# Altium PCB ArtFire.PcbDoc (part 1 of 2)
Units mil, origin at the board's own origin, x right, y up, seen from the top; angles counter-clockwise.
Board outline 4250 x 3350 mil, 2 copper layers (Top Layer, Bottom Layer); 232 components, 155 nets, 793 pads, 301 vias.
Unrouted connection lines stored in the file: 12.
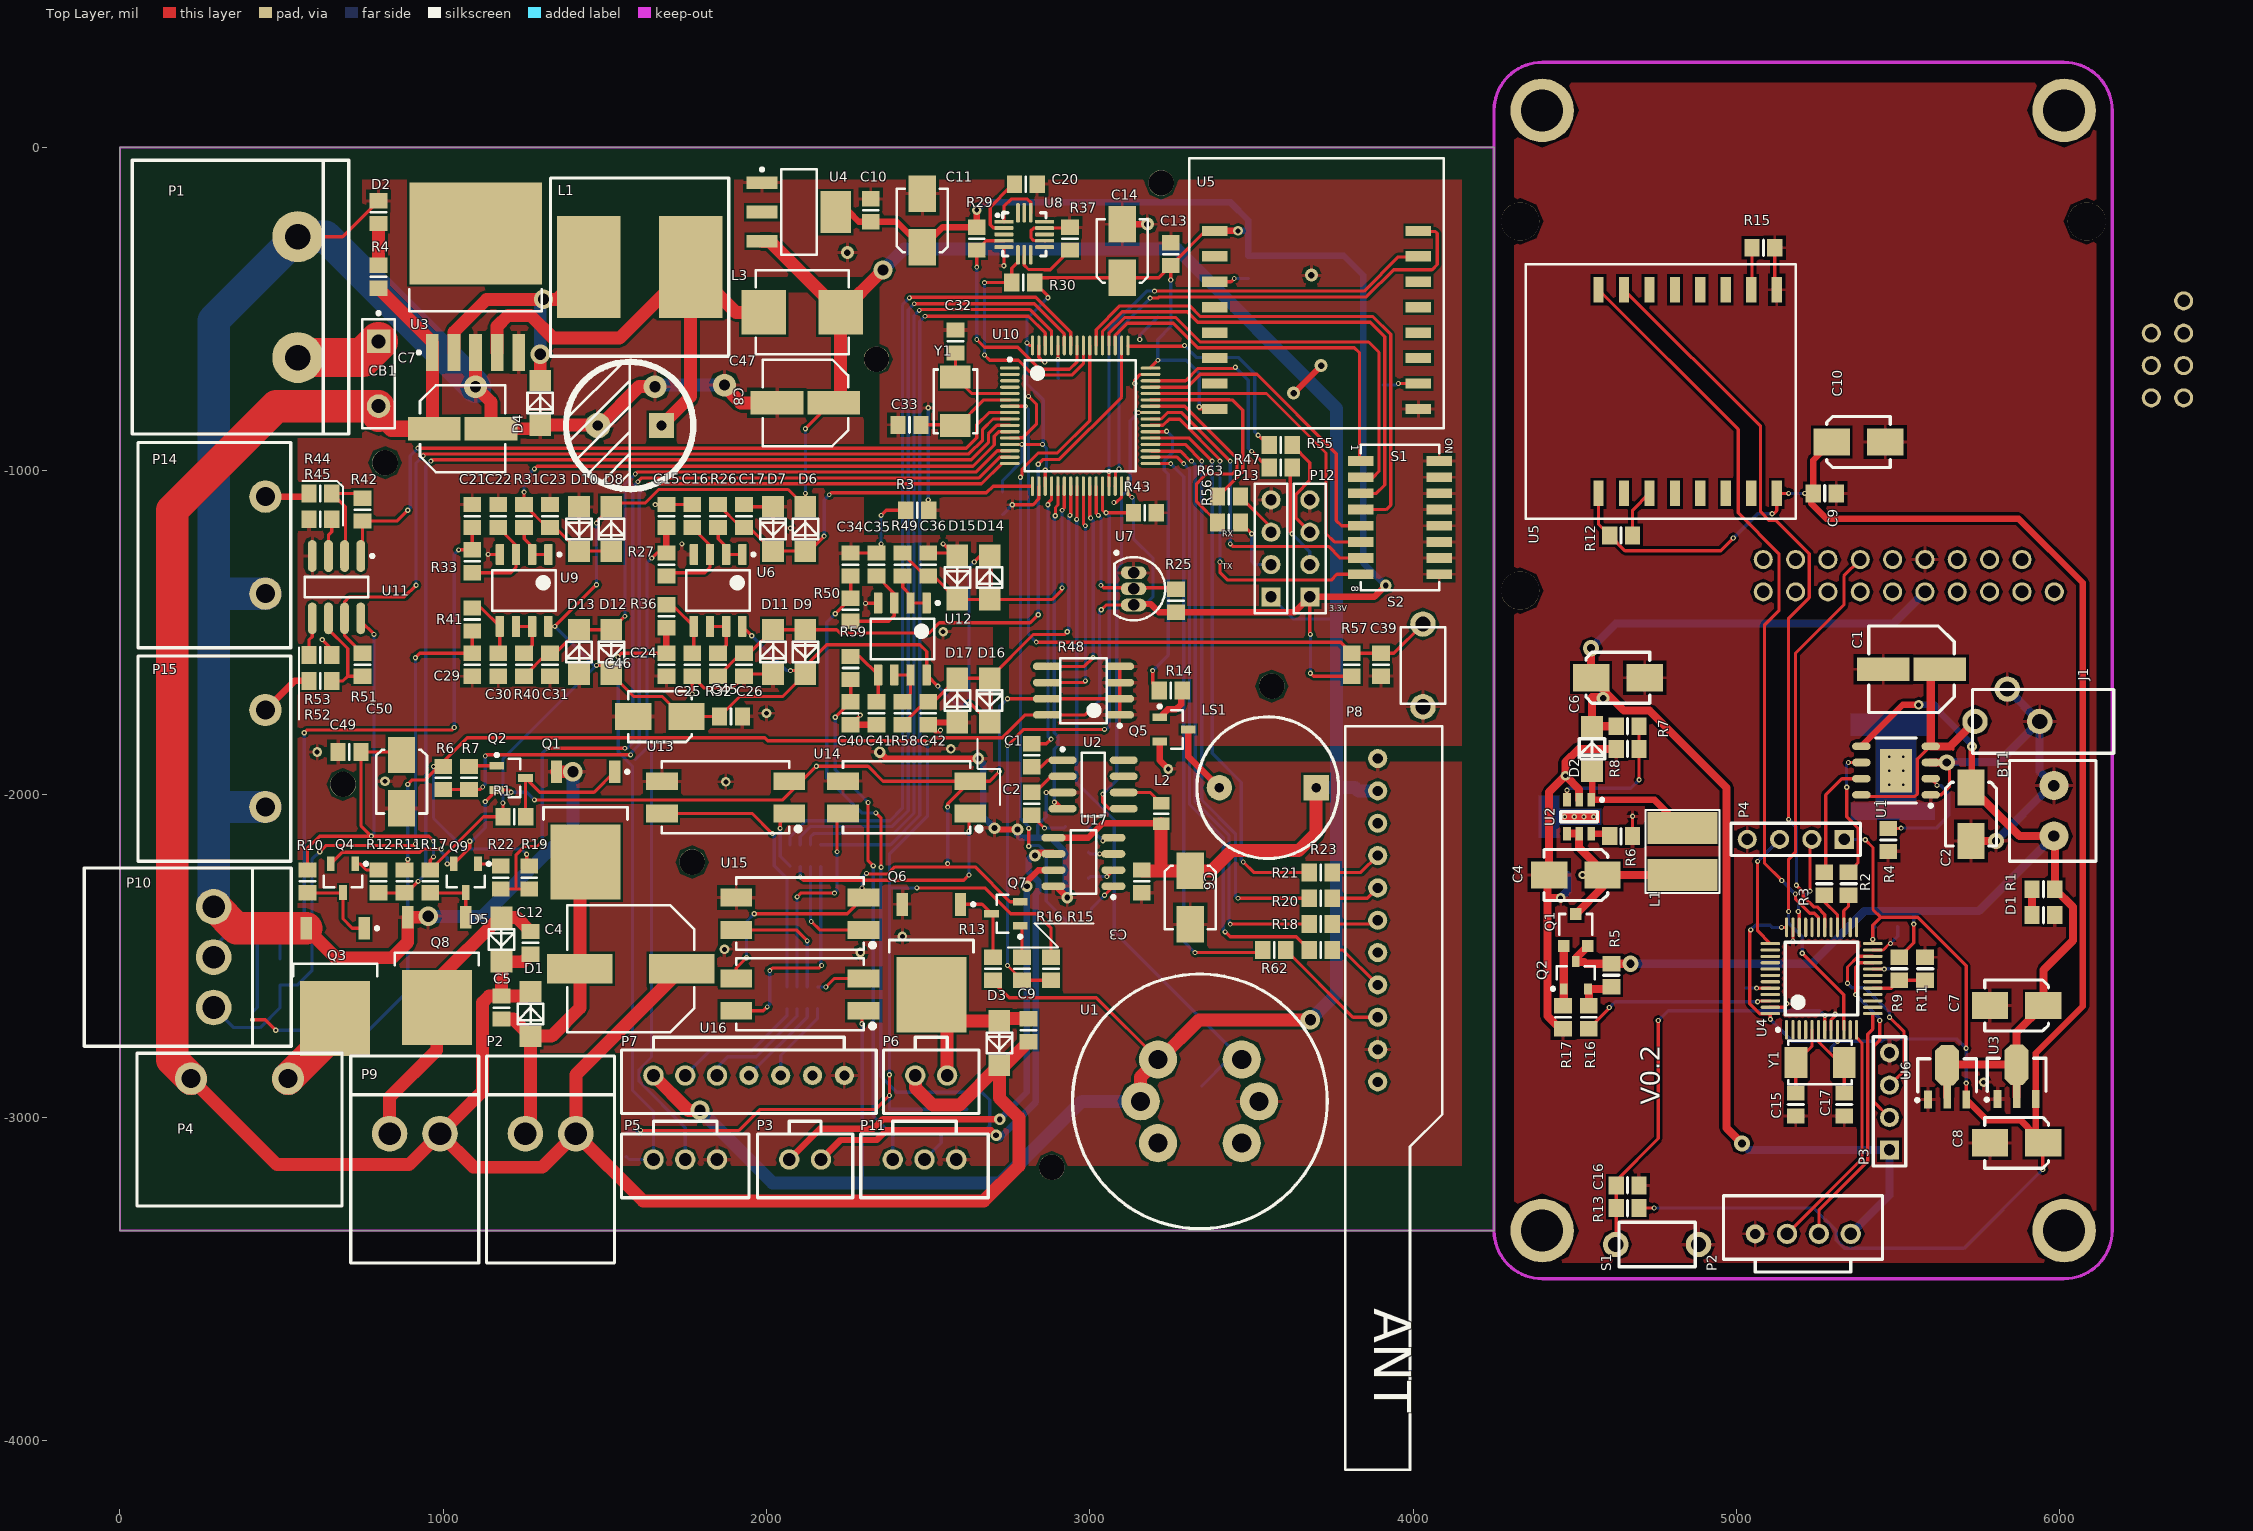
[diagram p0: Top Layer view]
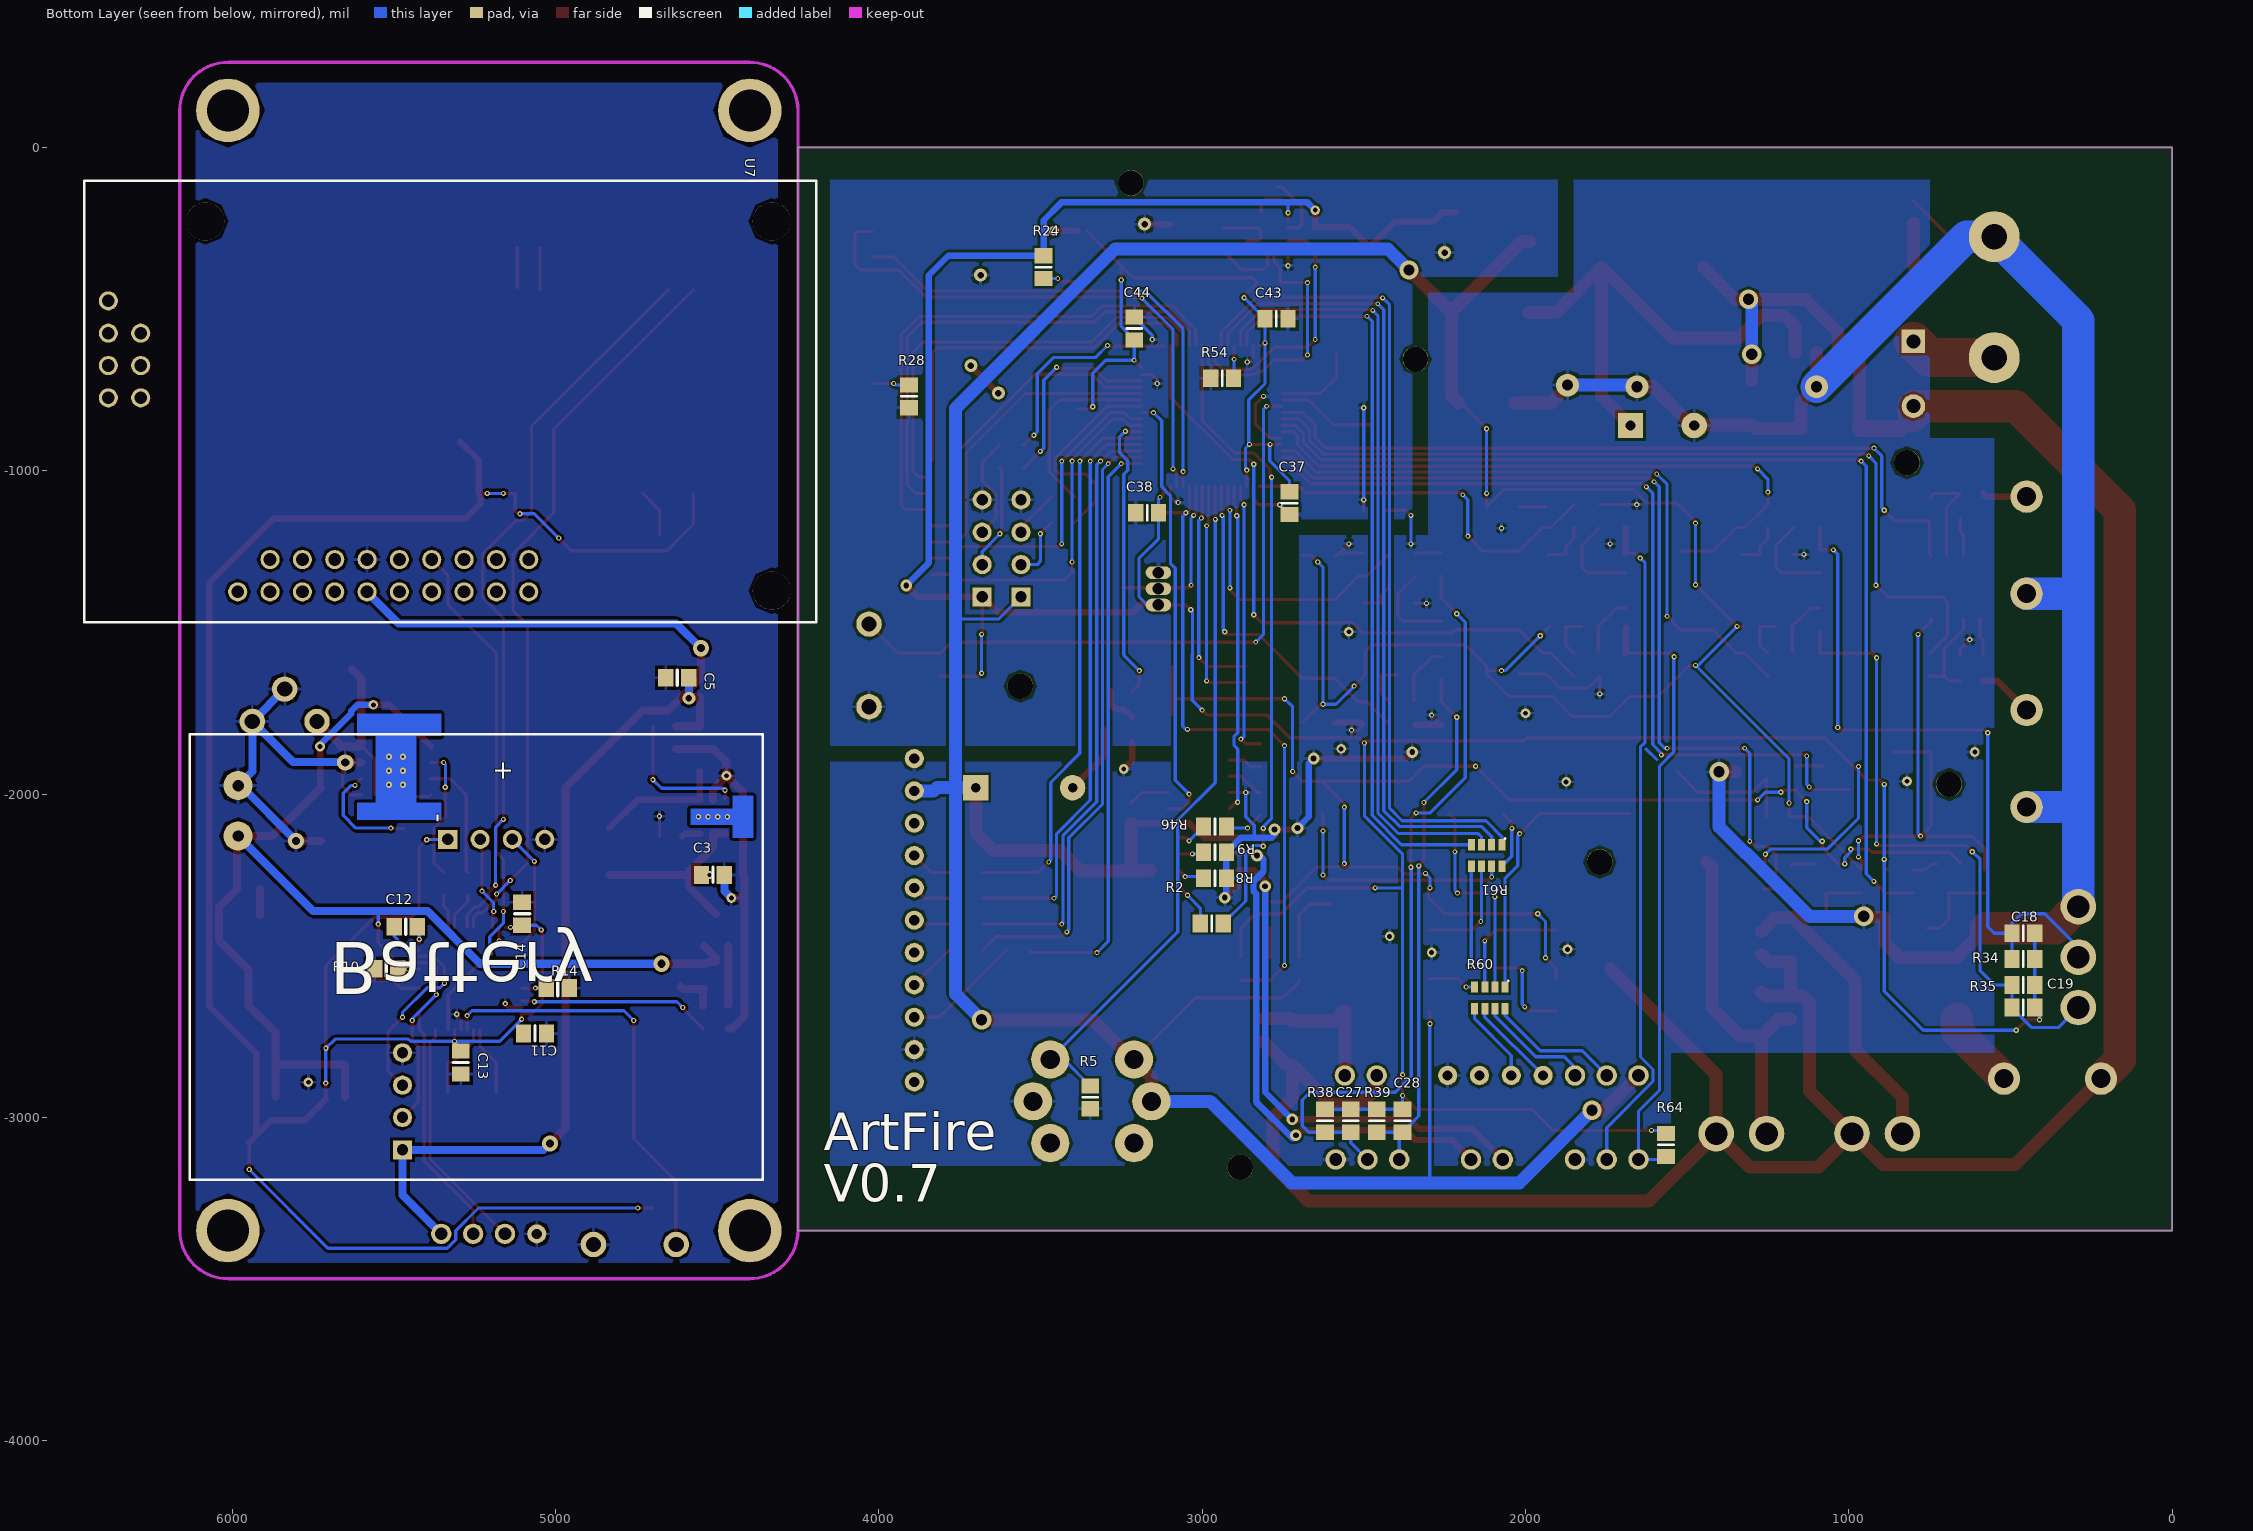
[diagram p1: Bottom Layer view, seen from below]

## Layer stack, top to bottom
Top Solder: solder mask 0.4, Solder Resist, Dk 3.5
Top Layer: signal copper 1.4
Dielectric 1: dielectric 12.6, FR-4, Dk 4.8
Bottom Layer: signal copper 1.4
Bottom Solder: solder mask 0.4, Solder Resist, Dk 3.5

## Board outline
0,-3350 0,0 4250,0 4250,-3350

## Design rules (kind name [scope] priority, off if disabled: settings)
Clearance [All] p1: gap=8
MinimumSolderMaskSliver [All] p1: minsoldermaskwidth=0
PolygonConnect [All] p1: connectstyle=Relief reliefconductorwidth=10 reliefentries=4 polygonreliefangle="90 Angle" airgapwidth=10
RoutingVias [All] p1: holewidth=8 width=8 viastyle="Through Hole" minholewidth=8 minwidth=15 maxholewidth=100 maxwidth=1000
SilkToSilkClearance [All] p1: silktosilkclearance=0
SilkToSolderMaskClearance [IsPad] p1: minsilkscreentomaskgap=0 clearancetoexposedcopper=TRUE
SolderMaskExpansion [All] p1: expansion=4
Width [All] p1: maxlimit=1000 minlimit=8 preferedwidth=8
27 further rules are at their usual default settings.

## Classes and differential pairs
component class ArtFire: C18 C19 C20 C21 C22 C23 C24 C25 C26 C27 C28 C29 C30 C31 C32 C33 C34 C35 C36 C37 C38 C39 C40 C41 C42 C43 C44 C45 C46 C47 C49 C50 CB1 D3 D4 D5 D6 D7 D8 D9 D10 D11 D12 D13 D14 D15 D16 D17 L2 L3 LS1 P1 P5 P6 P7 P8 P9 P10 P11 P12 P13 P14 P15 Q3 Q4 Q5 Q6 Q7 Q8 Q9 R18 R19 R20 R21 R22 R23 R24 R25 R26 R27 R28 R29 R30 R31 R32 R33 R34 R35 R36 R37 R38 R39 R40 R41 R42 R43 R44 R45 R46 R47 R48 R49 R50 R51 R52 R53 R54 R55 R56 R57 R58 R59 R60 R61 R62 R63 R64 S2 U8 U9 U10 U11 U12 U13 U14 U15 U16 U17

## Components (designator, comment, footprint, x,y, rotation, side; value= is the part's Value field where it differs from the comment)
BT1 "Battery" KF3.96_2P 5981.46,-2129.53 r180 top
C1 "Cap Semi" 6-0805_N 2820,-1880 r270 top
C1 "Cap Pol1" CAP_6.3*5.4MM 5540.83,-1614 r180 top
C2 "Cap Semi" 6-0805_N 2820,-2030 r90 top
C2 "Cap Pol1" Cap_5*4mm 5724.83,-2062 r270 top
C3 "Cap Semi" 6-0805_N 3160,-2270 r90 top
C3 "Cap Semi" 6-0805_N 4512.83,-2250 r180 bottom
C4 "Cap Pol1" CAP_10*10MM 1580,-2540 r180 top
C4 "Cap Pol1" Cap_5*4mm 4502.83,-2250 r180 top
C5 "Cap Semi" 6-0805_N 1180,-2660 r270 top
C5 "Cap Semi" 6-0805_N 4622.83,-1640 r0 bottom
C6 "Cap Pol1" Cap_5*4mm 3310,-2320 r270 top
C6 "Cap Pol1" Cap_5*4mm 4632.83,-1640 r0 top
C7 "Cap Pol1" CAP_6.3*5.4MM 1060,-870 r0 top
C7 "Cap Pol1" Cap_5*4mm 5866.02,-2653.62 r180 top
C8 "Cap Pol1" CAP10_17 1675,-860 r180 top
C8 "Cap Pol1" Cap_5*4mm 5866.02,-3078.62 r180 top
C9 "Cap Semi" 6-0805_N 2810,-2730 r90 top
C9 "Cap Semi" 6-0805_N 5272.83,-1070 r0 top
C10 "Cap Semi" 6-0805_N 2322,-194 r90 top
C10 "Cap Pol1" Cap_5*4mm 5376.83,-911 r0 top
C11 "Cap Pol1" Cap_5*4mm 2482,-226 r90 top
C11 "Cap Semi" 6-0805_N 5062.83,-2740 r180 bottom
C12 "Cap Semi" 6-0805_N 1270,-2460 r90 top
C12 "Cap Semi" 6-0805_N 5462.83,-2410 r0 bottom
C13 "Cap Semi" 6-0805_N 3250,-330 r90 top
C13 "Cap Semi" 6-0805_N 5292.83,-2830 r270 bottom
C14 "Cap Pol1" Cap_5*4mm 3100,-320 r90 top
C14 "Cap Semi" 6-0805_N 5102.83,-2370 r90 bottom
C15 "Cap Semi" 6-0805_N 1690,-1140 r270 top
C15 "Cap Semi" 6-0805_N 5182.83,-2960 r270 top
C16 "Cap Semi" 6-0805_N 1770,-1140 r270 top
C16 "Cap Semi" 6-0805_N 4662.83,-3210 r180 top
C17 "Cap Semi" 6-0805_N 1930,-1140 r270 top
C17 "Cap Semi" 6-0805_N 5332.83,-2960 r270 top
C18 "Cap Semi" 6-0805_N 460,-2430 r180 bottom
C19 "Cap Semi" 6-0805_N 460,-2660 r180 bottom
C20 "Cap Semi" 6-0805_N 2802,-114 r180 top
C21 "Cap Semi" 6-0805_N 1090,-1140 r270 top
C22 "Cap Semi" 6-0805_N 1170,-1140 r270 top
C23 "Cap Semi" 6-0805_N 1330,-1140 r270 top
C24 "Cap Semi" 6-0805_N 1690,-1600 r90 top
C25 "Cap Semi" 6-0805_N 1770,-1600 r90 top
C26 "Cap Semi" 6-0805_N 1930,-1600 r90 top
C27 "Cap Semi" 6-0805_N 2540,-3010 r90 bottom
C28 "Cap Semi" 6-0805_N 2380,-3010 r90 bottom
C29 "Cap Semi" 6-0805_N 1090,-1600 r90 top
C30 "Cap Semi" 6-0805_N 1170,-1600 r90 top
C31 "Cap Semi" 6-0805_N 1330,-1600 r90 top
C32 "Cap Semi" 6-0805_N 2584,-600 r90 top
C33 "Cap Semi" 6-0805_N 2442,-858 r180 top
C34 "Cap Semi" 6-0805_N 2260,-1290 r270 top
C35 "Cap Semi" 6-0805_N 2340,-1290 r270 top
C36 "Cap Semi" 6-0805_N 2500,-1290 r270 top
C37 "Cap Semi" 6-0805_N 2730,-1100 r270 bottom
C38 "Cap Semi" 6-0805_N 3170,-1130 r0 bottom
C39 "Cap Semi" 6-0805_N 3900,-1600 r90 top
C40 "Cap Semi" 6-0805_N 2260,-1750 r90 top
C41 "Cap Semi" 6-0805_N 2340,-1750 r90 top
C42 "Cap Semi" 6-0805_N 2500,-1750 r90 top
C43 "Cap Semi" 6-0805_N 2770,-530 r180 bottom
C44 "Cap Semi" 6-0805_N 3210,-560 r90 bottom
C45 "Cap Semi" 6-0805_N 1890,-1760 r0 top
C46 "Cap Pol1" Cap_5*4mm 1670,-1760 r180 top
C47 "Cap Pol1" CAP_6.3*5.4MM 2120,-790 r180 top
C49 "Cap Semi" 6-0805_N 710,-1870 r180 top
C50 "Cap Pol1" Cap_5*4mm 871.02,-1961.43 r270 top
CB1 "RF16700" SPST-2 800,-700 r270 top
D1 "Diode US1M" US1M 1270,-2680 r90 top
D1 "PWR" 6-0805_N 5948.83,-2374 r0 top
D2 "PWR" 6-0805_N 800,-200 r90 top
D2 "Diode US1M" US1M 4552.83,-1860 r90 top
D3 "Diode US1M" US1M 2720,-2770 r270 top
D4 "1N5822" US1M 1300,-790 r90 top
D5 "Diode US1M" US1M 1180,-2450 r270 top
D6 "Diode US1M" US1M 2120,-1180 r90 top
D7 "Diode US1M" US1M 2020,-1180 r270 top
D8 "Diode US1M" US1M 1520,-1180 r90 top
D9 "Diode US1M" US1M 2120,-1560 r270 top
D10 "Diode US1M" US1M 1420,-1180 r270 top
D11 "Diode US1M" US1M 2020,-1560 r90 top
D12 "Diode US1M" US1M 1520,-1560 r270 top
D13 "Diode US1M" US1M 1420,-1560 r90 top
D14 "Diode US1M" US1M 2690,-1330 r90 top
D15 "Diode US1M" US1M 2590,-1330 r270 top
D16 "Diode US1M" US1M 2690,-1710 r270 top
D17 "Diode US1M" US1M 2590,-1710 r90 top
J1 "PWR2.5" KLD-3.5-1.3mm 5737.24,-1775.2 r180 top
L1 "Inductor" CDRH127 1450,-370 r0 top
L1 "Inductor Iron CD54" CD54_Inductor 4832.83,-2250 r90 top
L2 "Inductor" 6-0805_L 3220,-2060 r270 top
L3 "Inductor" IND_0630 2110,-510 r0 top
LS1 "Buzzer" BUZZER 3550,-1980 r0 top
P1 "HB-9500" HB-9500 550,-650 r90 top
P2 "Pump2" CH3.96_2P 1410,-3050 r180 top
P2 "HIM" XH2.54-4P 5352.83,-3360 r180 top
P3 "4R Speaker" XH2.54-2P 2070,-3130 r0 top
P3 "UART_Debug_Port" HDR1X4 5472.83,-3100 r90 top
P4 "Fire_UP" KF7.62-2P 220,-2880 r0 top
P4 "Debug_Port" HDR1X4 5332.83,-2140 r180 top
P5 "Alcohol_Detect" XH2.54-3P 1650,-3130 r0 top
P6 "Fan" XH2.54-2P 2460,-2870 r0 top
P7 "XH2.54-7P" XH2.54-7P 1650,-2870 r0 top
P8 "Superheterodyne_Receiver" Sperheterodyne_Receiver 3890,-2890 r180 top
P9 "Pump_1" CH3.96_2P 990,-3050 r180 top
P10 "Fire_Detect" CH3.96_3P 290,-2660 r90 top
P11 "Leakage_Detect" XH2.54-3P 2390,-3130 r0 top
P12 "Debug_Port" HDR1X4 3680,-1390 r90 top
P13 "UART_Debug_Port" HDR1X4 3560,-1390 r90 top
P14 "thermoelectric_couple_f" KF7.62-2P 450,-1080 r270 top
P15 "thermoelectric_couple_t" KF7.62-2P 450,-1740 r270 top
Q1 "ADO484" DPAK_AOD484 1440,-2110 r270 top
Q1 "AO3400" AO-SOT23-3_V 4502.83,-2420 r0 top
Q2 "NPN" SOT-23_N 1210,-1950 r0 top
Q2 "S8550" SOT-23B_L 4502.83,-2560 r90 top
Q3 "ADO484" DPAK_AOD484 666,-2594 r270 top
Q4 "NPN" SOT-23_N 690,-2260 r270 top
Q5 "NPN" SOT-23_N 3260,-1800 r0 top
Q6 "ADO484" DPAK_AOD484 2510,-2520 r270 top
Q7 "NPN" SOT-23_N 2740,-2370 r180 top
Q8 "ADO484" DPAK_AOD484 980,-2560 r270 top
Q9 "NPN" SOT-23_N 1070,-2260 r270 top
R1 "Res3" 6-0805_N 1220,-2070 r0 top
R1 "Res3" 6-0805_N 5948.83,-2294 r180 top
R2 "Res3" 6-0805_N 2970,-2400 r0 bottom
R2 "Res3" 6-0805_N 5346.1,-2276.89 r270 top
R3 "Res3" 6-0805_N 2466,-1122 r0 top
R3 "Res3" 6-0805_N 5271.1,-2276.89 r270 top
R4 "Res" 6-0805_N 800,-400 r270 top
R4 "Res3" 6-0805_N 5468.83,-2142 r270 top
R5 "Res3" 6-0805_N 3346,-2938 r270 bottom
R5 "Res3" 6-0805_N 4612.83,-2560 r90 top
R6 "Res3" 6-0805_N 1000,-1950 r90 top
R6 "Res3" 6-0805_N 4642.83,-2130 r0 top
R7 "Res3" 6-0805_N 1080,-1950 r90 top
R7 "Res3" 6-0805_N 4662.83,-1790 r0 top
R8 "Res3" 6-0805_N 2960,-2260 r0 bottom
R8 "Res3" 6-0805_N 4662.83,-1860 r180 top
R9 "Res3" 6-0805_N 2960,-2180 r0 bottom
R9 "Res3" 6-0805_N 5502.83,-2540 r270 top
R10 "Res3" 6-0805_N 580,-2270 r270 top
R10 "Res3" 6-0805_N 5522.83,-2540 r0 bottom
R11 "Res3" 6-0805_N 880,-2270 r90 top
R11 "Res3" 6-0805_N 5582.83,-2540 r90 top
R12 "Res3" 6-0805_N 800,-2270 r90 top
R12 "Res3" 6-0805_N 4642.83,-1200 r180 top
R13 "Res3" 6-0805_N 2700,-2540 r90 top
R13 "Res3" 6-0805_N 4662.83,-3280 r180 top
R14 "Res3" 6-0805_N 3250,-1680 r180 top
R14 "Res3" 6-0805_N 4992.83,-2600 r180 bottom
R15 "Res3" 6-0805_N 2880,-2540 r90 top
R15 "Res3" 6-0805_N 5082.83,-310 r0 top
R16 "Res3" 6-0805_N 2790,-2540 r90 top
R16 "Res3" 6-0805_N 4542.83,-2690 r90 top
R17 "Res3" 6-0805_N 960,-2270 r270 top
R17 "Res3" 6-0805_N 4462.83,-2690 r270 top
R18 "Res3" 6-0805_N 3714,-2482 r180 top
R19 "Res3" 6-0805_N 1266,-2258 r90 top
R20 "Res3" 6-0805_N 3714,-2402 r180 top
R21 "Res3" 6-0805_N 3714,-2322 r180 top
R22 "Res3" 6-0805_N 1178,-2258 r90 top
R23 "Res3" 6-0805_N 3714,-2242 r180 top
R24 "Res3" 6-0805_N 3490,-370 r90 bottom
R25 "Res3" 6-0805_N 3266,-1402 r270 top
R26 "Res3" 6-0805_N 1850,-1140 r270 top
R27 "Res3" 6-0805_N 1690,-1290 r90 top
R28 "Res3" 6-0805_N 3906,-770 r270 bottom
R29 "Res3" 6-0805_N 2650,-282 r90 top
R30 "Res3" 6-0805_N 2794,-418 r0 top
R31 "Res3" 6-0805_N 1250,-1140 r270 top
R32 "Res3" 6-0805_N 1850,-1600 r90 top
R33 "Res3" 6-0805_N 1090,-1280 r90 top
R34 "Res3" 6-0805_N 460,-2510 r180 bottom
R35 "Res3" 6-0805_N 460,-2590 r180 bottom
R36 "Res3" 6-0805_N 1690,-1450 r270 top
R37 "Res3" 6-0805_N 2938,-282 r270 top
R38 "Res3" 6-0805_N 2620,-3010 r90 bottom
R39 "Res3" 6-0805_N 2460,-3010 r90 bottom
R40 "Res3" 6-0805_N 1250,-1600 r90 top
R41 "Res3" 6-0805_N 1090,-1460 r270 top
R42 "Res3" 6-0805_N 750,-1120 r270 top
R43 "Res3" 6-0805_N 3170,-1130 r180 top
R44 "Res3" 6-0805_N 620,-1070 r0 top
R45 "Res3" 6-0805_N 620,-1150 r0 top
R46 "Res3" 6-0805_N 2960,-2100 r0 bottom
R47 "Res3" 6-0805_N 3590,-990 r180 top
R48 "AT24C02" SOP8_TDA2822 2980,-1680 r180 top
R49 "Res3" 6-0805_N 2420,-1290 r270 top
R50 "Res3" 6-0805_N 2260,-1430 r90 top
R51 "Res3" 6-0805_N 750,-1600 r90 top
R52 "Res3" 6-0805_N 620,-1650 r0 top
R53 "Res3" 6-0805_N 620,-1570 r180 top
R54 "Res3" 6-0805_N 2938,-714 r180 bottom
R55 "Res3" 6-0805_N 3590,-920 r180 top
R56 "Res3" 6-0805_N 3430,-1160 r180 top
R57 "Res3" 6-0805_N 3810,-1600 r90 top
R58 "Res3" 6-0805_N 2420,-1750 r90 top
R59 "Res3" 6-0805_N 2260,-1610 r270 top
R60 "Res_Pack_100R" Res_Pack_0603 2110,-2630 r270 bottom
R61 "Res_Pack_100R" Res_Pack_0603 2120,-2190 r270 bottom
R62 "Res3" 6-0805_N 3570,-2482 r180 top
R63 "Res3" 6-0805_N 3430,-1080 r180 top
R64 "Res3" 6-0805_N 1565,-3085 r270 bottom
S1 "SW DIP-8" DHN(F)_8Pin 4080,-970 r270 top
S1 "Reset" SWP_PB_6.5mm 4882.2,-3392.8 r180 top
S2 "Reset" SWP_PB_6.5mm 4030,-1730 r90 top
U1 "MQ_Alcohol" MQ 3340,-2950 r0 top
U1 "TP4056" Power_SOP8 5493.02,-1927.2 r180 top
U2 "M62429" SO8_N 3010,-1970 r0 top
U2 "FP6291" SOT23-6L 4512.83,-2070 r270 top
U3 "LM2576SX-5.0" TS5B_L 1100,-400 r90 top
U3 "HT7333-SOT89" SOT89_N 5866.02,-2868.19 r90 top
U4 "AMS1117" SOT223_N 2100,-200 r0 top
U4 "STM32F103C8T6" STM-LQFP48_L 5262.75,-2570.6 r90 top
U5 "ESP-07" ESP-07_Wifi 3386,-258 r0 top
U5 "ESP-07" ESP-07_Wifi 4572.83,-1070 r90 top
U6 "LM2904M" D0008A_M 1850,-1370 r270 top
U6 "HT7333-SOT89" SOT89_N 5651.02,-2869.62 r90 top
U7 "DS18B20" TO-92A 3135,-1365 r180 top
U7 "MH-Z14A" MH-Z14A 6456.83,-1469 r180 bottom
U8 "MMA8452Q" QFN-16 2738,-210 r0 top
U9 "LM2904M" D0008A_M 1250,-1370 r270 top
U10 "STM32F103RCT6" LQFP64_L 2970,-830 r0 top
U11 "LM358AMX" M08A_M 670,-1360 r270 top
U12 "LM2904M" D0008A_M 2420,-1520 r270 top
U13 "KP10104CTLD" KP10104CTLD 2070,-2060 r180 top
U14 "KP10104CTLD" KP10104CTLD 2630,-2060 r180 top
U15 "KP10104CTLD" KP10104CTLD 2300,-2420 r180 top
U16 "KP10104CTLD" KP10104CTLD 2300,-2670 r180 top
U17 "CS8508E" SO8_L 2980,-2210 r180 top
Y1 "XTAL" OSC_5032_2Pin 2584,-860 r90 top
Y1 "XTAL" OSC_5032_2Pin 5332.83,-2830 r180 top

## Footprints (in the part's own frame and the unit in brackets; to place one, negate y for a bottom-side part, rotate by r counter-clockwise, add the part's x,y. Pads: shape width x height; smd on the part's side, far side on the other; paste and mask are expansions set on the pad)
6-0805_L [mm] "Chip Resistor, Body 2.0x1.2mm, IPC High Density"
  rect 1x1.3 smd: 1(-0.8,0) 2(0.8,0)
  silkscreen extent 0,-0.55 0,0.55, body extent -1.07,-0.7 1.07,0.7, height 0.7
6-0805_N [mm] "Chip Resistor, Body 2.0x1.2mm, IPC Medium Density"
  rect 1.2x1.4 smd: 1(-0.9,0) 2(0.9,0)
  silkscreen extent 0,-0.6 0,0.6, body extent -1.07,-0.7 1.07,0.7, height 0.7
AO-SOT23-3_V [mm] "SOT23, 3-Leads, Body 3.016x2.8mm, Pitch 0.95mm"
  rect 0.9x0.95 smd: 1(-0.95,-1.25) 2(0.95,-1.25) 3(0,1.25)
  silkscreen extent -1.3,-0.38 1.3,1.25, body extent -1.14,-1.25 1.17,1.36, height 1.25
BUZZER [mm]
  rect 2x2 hole 0.762: 1(3.8,0)
  round 2 hole 0.762: 2(-3.8,0)
  silkscreen extent -5.56,-5.57 5.57,5.57
CAP10_17 [mm]
  rect 2x2 hole 0.8: 1(0,0)
  round 2 hole 0.8: 2(5,0)
  silkscreen extent -2.5,-5 7.5,5
Cap_5*4mm [mm]
  rect 2.85x2.15 smd: 1(-2.1,0) 2(2.1,0)
  silkscreen extent -2.5,-2 2.5,2, body extent -2.5,-2 2.5,2, height 6
CAP_6.3*5.4MM [mm] "Aluminum Electrolytic Capacitor, Body 6.50x6.60x5.40mm, IPC Low Density"
  rect 4.15x1.85 smd: 1(-2.225,0) 2(2.225,0)
  silkscreen extent -3.35,-3.4 3.35,3.4, body extent -3.35,-3.4 3.35,3.4, height 5.4
CAP_10*10MM [mm]
  rect 5.15x2.35 smd: 1(-4,0) 2(4,0)
  silkscreen extent -5,-5 5,5, body extent -5,-5 5,5, height 10
CD54_Inductor [mm] "CD54 Inductor"
  rect 2.5x5.5 smd: 1(0,0) 2(3.7,0)
  silkscreen extent -1.4,-2.9 5.1,2.9
CDRH127 [mm]
  rect 5x8 smd: 1(0,0) 2(8,0)
  silkscreen extent -3,-7 11,7
CH3.96_2P [mil]
  round 110 hole 70: 1(0,0) 2(155.91,0)
  silkscreen extent -120,-240 276,400
CH3.96_3P [mil]
  round 110 hole 70: 1(0,0) 2(155.91,0) 3(311.81,0)
  silkscreen extent -120,-240 432,400
D0008A_M [mm] "SOIC, 8-Leads, Body 5x4mm, Pitch 1.27mm, IPC Low Density"
  rrect15% 1.65x0.65 smd: 1(-2.825,1.905) 2(-2.825,0.635) 3(-2.825,-0.635) 4(-2.825,-1.905) 5(2.825,-1.905) 6(2.825,-0.635) 7(2.825,0.635) 8(2.825,1.905)
  silkscreen extent -2.95,-2.5 1.6,2.91, body extent -3,-2.45 3,2.45, height 1.63
DHN(F)_8Pin [mm]
  rect 0.76x2 smd: 1(0,-6.15) 2(1.27,-6.15) 3(2.54,-6.15) 4(3.81,-6.15) 5(5.08,-6.15) 6(6.35,-6.15) 7(7.62,-6.15) 8(8.89,-6.15) 9(8.89,0) 10(7.62,0) 11(6.35,0) 12(5.08,0) 13(3.81,0) 14(2.54,0) 15(1.27,0) 16(0,0)
  silkscreen extent -1.27,-6.15 10.16,0
DPAK_AOD484 [mm] "D-PAK, 3-Pads, Body 5.95x6.66mm (max), IPC Medium Density"
  rect 1.8x0.9 smd: 1(-4.55,2.28) 3(-4.55,-2.28)
  rect 5.9x5.5 smd: 2(2.55,0)
  silkscreen extent -4.67,-3.3 -0.8,3.41, body extent -1.75,-3.3 3.95,3.3, height 2.38
ESP-07_Wifi [mm]
  rect 2x0.8 smd: 1(0,0) 2(0,-2) 3(0,-4) 4(0,-6) 5(0,-8) 6(0,-10) 7(0,-12) 8(0,-14) 9(16,-14) 10(16,-12) 11(16,-10) 12(16,-8) 13(16,-6) 14(16,-4) 15(16,-2) 16(16,0)
  silkscreen extent -2,-15.5 18,5.7
HB-9500 [mm]
  round 4 hole 2: 1(0,0) 2(9.5,0)
  silkscreen extent -6,-4 15.5,13
HDR1X4 [mm] "Connector; Header; 4 Position"
  rect 1.5x1.5 hole 0.9: 1(0,0)
  round 1.5 hole 0.9: 2(2.54,0) 3(5.08,0) 4(7.62,0)
  silkscreen extent -1.27,-1.27 8.89,1.27
IND_0630 [mm] "PowerInductor"
  rect 3.5x3.5 smd: 1(-3.025,0) 2(3.025,0)
  silkscreen extent -3.65,-3.3 3.65,3.3
KF3.96_2P [mil]
  round 90 hole 35.43: 1(0,0) 2(0,-155.91)
  silkscreen extent -130,-234 138,78
KF7.62-2P [mm] "KF7.62-2P"
  round 2.54 hole 1.5: 1(0,0) 2(7.62,0)
  silkscreen extent -4.25,-10 11.87,2
KLD-3.5-1.3mm [mm]
  round 2 hole 1.2: 1(0,0) 2(-5.08,0) 3(-2.54,-2.54)
  silkscreen extent -10.9,-2.5 0.2,2.5
KP10104CTLD [mm]
  rect 2.5x1.4 smd: 1(0,0) 2(0,-2.54) 3(10,-2.54) 4(10,0)
  silkscreen extent -0.8,-4.12 10,1.55
LQFP64_L [mm] "Thin QFP, 64-Leads, Body 10x10mm, Pitch 0.5mm, IPC High Density"
  oval 1.55x0.25 smd: 1(-5.525,3.75) 2(-5.525,3.25) 3(-5.525,2.75) 4(-5.525,2.25) 5(-5.525,1.75) 6(-5.525,1.25) 7(-5.525,0.75) 8(-5.525,0.25) 9(-5.525,-0.25) 10(-5.525,-0.75) 11(-5.525,-1.25) 12(-5.525,-1.75) 13(-5.525,-2.25) 14(-5.525,-2.75) 15(-5.525,-3.25) 16(-5.525,-3.75) 33(5.525,-3.75) 34(5.525,-3.25) 35(5.525,-2.75) 36(5.525,-2.25) 37(5.525,-1.75) 38(5.525,-1.25) 39(5.525,-0.75) 40(5.525,-0.25) 41(5.525,0.25) 42(5.525,0.75) 43(5.525,1.25) 44(5.525,1.75) 45(5.525,2.25) 46(5.525,2.75) 47(5.525,3.25) 48(5.525,3.75)
  oval 0.25x1.55 smd: 17(-3.75,-5.525) 18(-3.25,-5.525) 19(-2.75,-5.525) 20(-2.25,-5.525) 21(-1.75,-5.525) 22(-1.25,-5.525) 23(-0.75,-5.525) 24(-0.25,-5.525) 25(0.25,-5.525) 26(0.75,-5.525) 27(1.25,-5.525) 28(1.75,-5.525) 29(2.25,-5.525) 30(2.75,-5.525) 31(3.25,-5.525) 32(3.75,-5.525) 49(3.75,5.525) 50(3.25,5.525) 51(2.75,5.525) 52(2.25,5.525) 53(1.75,5.525) 54(1.25,5.525) 55(0.75,5.525) 56(0.25,5.525) 57(-0.25,5.525) 58(-0.75,5.525) 59(-1.25,5.525) 60(-1.75,5.525) 61(-2.25,5.525) 62(-2.75,5.525) 63(-3.25,5.525) 64(-3.75,5.525)
  silkscreen extent -5.65,-4.35 4.35,4.55, body extent -5,-5 5,5, height 1.6
M08A_M [mm] "SOIC, 8-Leads, Body 4.9x3.9mm, Pitch 1.27mm, IPC Low Density"
  oval 2.5x0.7 smd: 1(-2.45,1.905) 2(-2.45,0.635) 3(-2.45,-0.635) 4(-2.45,-1.905) 5(2.45,-1.905) 6(2.45,-0.635) 7(2.45,0.635) 8(2.45,1.905)
  silkscreen extent -2.57,-2.5 0.8,2.93, body extent -2,-2.5 2,2.5, height 1.75
MH-Z14A [mm] "CO2 Detector"
  round 3 hole 3: 0(9.5,31.5) 0(54,2.5) 0(54,31.5)
  round 1.5 hole 1: 1(22.21,2.4) 2(22.21,4.94) 3(24.75,2.4) 4(24.75,4.94) 5(27.29,2.4) 6(27.29,4.94) 7(29.83,2.4) 8(29.83,4.94) 9(32.37,2.4) 10(32.37,4.94) 11(34.91,2.4) 12(34.91,4.94) 13(14.59,4.94) 14(17.13,4.94) 15(19.67,4.94) 16(19.67,2.4) 17(17.13,2.4) 18(14.59,2.4) 19(12.05,2.4) 20(1.89,25.26) 21(1.89,22.72) 22(1.89,20.18) 23(1.89,17.64) 24(4.43,17.64) 25(4.43,20.18) 26(4.43,22.72)
  silkscreen extent 0,0 57.5,34.7
MQ [mm]
  round 3 hole 1.5: 1(-3.288,3.288) 2(-4.65,0) 3(-3.288,-3.288) 4(3.288,-3.288) 5(4.65,0) 6(3.288,3.288)
  silkscreen extent -10,-10 10,10
OSC_5032_2Pin [mm]
  rect 1.8x2.4 smd: 1(0,0) 2(3.8,0)
  silkscreen extent -0.6,-1.7 4.4,1.7
Power_SOP8 [mm] "SOP, 8-Leads, Body 4.90x3.90mm, Pitch 1.27mm, Thermal Pad 3.41x2.52mm, IPC Medium Density"
  oval 1.45x0.6 smd: 1(-2.725,1.905) 2(-2.725,0.635) 3(-2.725,-0.635) 4(-2.725,-1.905) 5(2.725,-1.905) 6(2.725,-0.635) 7(2.725,0.635) 8(2.725,1.905)
  rect 2.52x3.41 smd: 9(0,0)
  Bottom Layer region: -1.6,-2.7 1.6,-2.7 1.6,2.5 -1.6,2.5
  silkscreen extent -2.85,-2.55 1.6,2.88, body extent -2,-2.55 2,2.55, height 1.75
QFN-16 [mm] "MMA8452Q"
  rrect50% 1.5x0.3 smd: 1(-0.1,-0.5) 2(-0.1,-1) 3(-0.1,-1.5) 4(-0.1,-2) 5(-0.1,-2.5) 9(3.1,-2.5) 10(3.1,-2) 11(3.1,-1.5) 12(3.1,-1) 13(3.1,-0.5)
  rrect50% 0.3x1.5 smd: 6(1,-3.1) 7(1.5,-3.1) 8(2,-3.1) 14(2,0.2) 15(1.5,0.2) 16(1,0.2)
  silkscreen extent -0.7,-3.2 3.2,0.2
Res_Pack_0603 [mm] "Chip Array, ConvexE, 8-Leads, Pitch 0.80mm,  Body 3.20x1.50mm,  IPC Medium Density"
  rect 0.9x0.55 smd: 1(-0.85,1.2) 2(-0.85,0.4) 3(-0.85,-0.4) 4(-0.85,-1.2) 5(0.85,-1.2) 6(0.85,-0.4) 7(0.85,0.4) 8(0.85,1.2)
  silkscreen extent -1.39,1.39 -1.29,1.49, body extent -0.82,-1.68 0.82,1.68, height 0.6
SO8_L [mm] "SOIC, 8-Leads, Body 4.9x3.9mm, Pitch 1.27mm, IPC High Density"
  oval 1.9x0.6 smd: 1(-2.35,1.905) 2(-2.35,0.635) 3(-2.35,-0.635) 4(-2.35,-1.905) 5(2.35,-1.905) 6(2.35,-0.635) 7(2.35,0.635) 8(2.35,1.905)
  silkscreen extent -2.48,-2.5 1,2.88, body extent -2,-2.5 2,2.5, height 1.75
SO8_N [mm] "SOIC, 8-Leads, Body 4.9x3.9mm, Pitch 1.27mm, IPC Medium Density"
  oval 2.2x0.6 smd: 1(-2.4,1.905) 2(-2.4,0.635) 3(-2.4,-0.635) 4(-2.4,-1.905) 5(2.4,-1.905) 6(2.4,-0.635) 7(2.4,0.635) 8(2.4,1.905)
  silkscreen extent -2.52,-2.5 0.9,2.88, body extent -2,-2.5 2,2.5, height 1.75
SOP8_TDA2822 [mm] "TSOP, 8-Leads, Body 5.00x3.95mm, Pitch 1.27mm, IPC Medium Density"
  oval 2.25x0.6 smd: 1(-2.85,1.905) 2(-2.85,0.635) 3(-2.85,-0.635) 4(-2.85,-1.905) 5(2.85,-1.905) 6(2.85,-0.635) 7(2.85,0.635) 8(2.85,1.905)
  silkscreen extent -2.98,-2.55 1.83,2.88, body extent -2,-2.55 2,2.55, height 1.55
SOT23-6L [mm] "SOT23, 6-Leads, Body 2.90x2.80mm, Pitch 0.95mm, IPC Medium Density"
  rect 1.05x0.6 smd: 1(-1.325,0.95) 2(-1.325,0) 3(-1.325,-0.95) 4(1.325,-0.95) 5(1.325,0) 6(1.325,0.95)
  silkscreen extent -1.45,-1.45 0.4,1.93, body extent -0.8,-1.45 0.8,1.45, height 1.45
SOT89_N [mm] "SOT89, 3-Leads, Body 4.5x2.4 mm, Pitch 1.5mm, Lead Span 4.1mm, IPC Medium Density"
  rect 1.4x0.6 smd: 1(-1.9,1.5) 3(-1.9,-1.5)
  rect 1.8x0.6 smd: 2(-1.7,0)
  oct 3.2x1.9 smd: 2(0.8,0)
  silkscreen extent -2.07,-2.3 1.3,2.47, body extent -1.3,-2.3 1.29,2.3, height 1.6
SOT223_N [mm] "SOT223, 4-Leads, Body 6.5x3.5mm, Pitch 2.3mm, Lead Span 7mm, IPC Medium Density"
  rect 2.4x1 smd: 1(-2.9,2.3) 2(-2.9,0) 3(-2.9,-2.3)
  rect 2.4x3.3 smd: 4(2.9,0)
  silkscreen extent -3.02,-3.35 1.4,3.47, body extent -1.85,-3.35 1.85,3.35, height 1.7
SOT-23_N [mm] "SOT23, 3-Leads, Body 2.9x1.3mm, Pitch 0.95mm, Lead Span 2.5mm, IPC Medium Density"
  rect 1.15x0.6 smd: 1(-1.125,0.95) 2(-1.125,-0.95) 3(1.125,0)
  silkscreen extent -1.25,-1.5 0.7,1.92, body extent -0.7,-1.5 0.7,1.5, height 1.1
SOT-23B_L [mm] "SOT23, 3-Leads, Body 2.9x1.3mm, Pitch 0.95mm, Lead Span 2.4mm, IPC High Density"
  rect 0.85x0.6 smd: 1(-1.075,0.95) 2(-1.075,-0.95) 3(1.075,0)
  silkscreen extent -1.2,-1.5 0.7,1.92, body extent -0.7,-1.5 0.7,1.5, height 1.14
Sperheterodyne_Receiver [mm]
  round 1.5 hole 0.8: 1(0,0) 2(0,-2.54) 3(0,-5.08) 4(0,-7.62) 5(0,-10.16) 6(0,-12.7) 7(0,-15.24) 8(0,-17.78) 9(0,-20.32) 10(0,-22.86) 11(0,-25.4)
  silkscreen extent -5.08,-27.94 2.54,30.48
SPST-2 [mm] "Switch; 2 Leads"
  rect 1.85x1.85 hole 1.1: 1(-2.54,0)
  round 1.85 hole 1.1: 2(2.54,0)
  silkscreen extent -4.89,-1.27 4.28,1.27
STM-LQFP48_L [mm] "QFP, 48-Leads, Body 7x7mm, Pitch 0.5mm, IPC High Density"
  oval 1.55x0.25 smd: 1(-4.025,2.75) 2(-4.025,2.25) 3(-4.025,1.75) 4(-4.025,1.25) 5(-4.025,0.75) 6(-4.025,0.25) 7(-4.025,-0.25) 8(-4.025,-0.75) 9(-4.025,-1.25) 10(-4.025,-1.75) 11(-4.025,-2.25) 12(-4.025,-2.75) 25(4.025,-2.75) 26(4.025,-2.25) 27(4.025,-1.75) 28(4.025,-1.25) 29(4.025,-0.75) 30(4.025,-0.25) 31(4.025,0.25) 32(4.025,0.75) 33(4.025,1.25) 34(4.025,1.75) 35(4.025,2.25) 36(4.025,2.75)
  oval 0.25x1.55 smd: 13(-2.75,-4.025) 14(-2.25,-4.025) 15(-1.75,-4.025) 16(-1.25,-4.025) 17(-0.75,-4.025) 18(-0.25,-4.025) 19(0.25,-4.025) 20(0.75,-4.025) 21(1.25,-4.025) 22(1.75,-4.025) 23(2.25,-4.025) 24(2.75,-4.025) 37(2.75,4.025) 38(2.25,4.025) 39(1.75,4.025) 40(1.25,4.025) 41(0.75,4.025) 42(0.25,4.025) 43(-0.25,4.025) 44(-0.75,4.025) 45(-1.25,4.025) 46(-1.75,4.025) 47(-2.25,4.025) 48(-2.75,4.025)
  silkscreen extent -4.15,-2.85 2.85,3.55, body extent -3.5,-3.5 3.5,3.5, height 1.6
SWP_PB_6.5mm [mm]
  round 2 hole 1.2: 1(0,0) 2(6.5,0)
  silkscreen extent 0.25,-1.75 6.25,1.75
TO-92A [mm] "TO, Flat Index; 3 In-Line, Axial Leads; Body Dia. 4.5mm; Leads 0.51 x 0.48 mm (max)"
  oval 2x1 hole 0.9: 1(0,-1.27) 2(0,0) 3(0,1.27)
  silkscreen extent -2.48,-2.95 1.5,2.48, body extent -2.48,-2.5 1.5,2.5, height 6.86
TS5B_L [mm] "D2-PAK, 6-Leads, Body 8.6x10.2mm, Pitch 1.7mm, Lead Span 14.1mm, IPC High Density"
  rect 2.9x1 smd: 1(-5.95,3.4) 2(-5.95,1.7) 3(-5.95,0) 4(-5.95,-1.7) 5(-5.95,-3.4)
  rect 8x10.4 smd: 6(3.4,0)
  silkscreen extent -6.07,-5.2 -1,5.2, body extent -2.7,-5.2 6.19,5.2, height 4.65
US1M [mm]
  rect 1.7x1.7 smd: 1(-1.74,0) 2(1.74,0)
  silkscreen extent -0.8,-1 0.8,1
XH2.54-2P [mm]
  round 1.6 hole 1: 1(0,0) 2(2.5,0)
  silkscreen extent -2.5,-3 5,3
XH2.54-3P [mm]
  round 1.6 hole 1: 1(0,0) 2(2.5,0) 3(5,0)
  silkscreen extent -2.5,-3 7.5,3
XH2.54-4P [mm]
  round 1.6 hole 1: 1(0,0) 2(2.5,0) 3(5,0)
  round 1.5 hole 0.8: 4(7.5,0)
  silkscreen extent -2.5,-3 10,3
XH2.54-7P [mm]
  round 1.6 hole 1: 1(0,0) 2(2.5,0) 3(5,0)
  round 1.5 hole 0.8: 4(7.5,0) 5(10,0) 6(12.5,0) 7(15,0)
  silkscreen extent -2.5,-3 17.5,3

## Part data
BT1: "Multicell Battery"
C1 C2 C3 C3 C5 C5 C9 C9 C10 C11 C12 C12 C13 C13 C14 C15 C15 C16 C16 C17 C17 C18 C19 C20 C21 C22 C23 C24 C25 C26 C27 C28 C29 C30 C31 C32 C33 C34 C35 C36 C37 C38 C39 C40 C41 C42 C43 C44 C45 C49: "Capacitor (Semiconductor SIM Model)"
C1 C2 C4 C4 C6 C6 C7 C7 C8 C8 C10 C11 C14 C46 C47 C50: "Polarized Capacitor (Radial)"
CB1: library part "Circuit Breaker", "Circuit Breaker"
D1 D2 D3 D4 D5 D6 D7 D8 D9 D10 D11 D12 D13 D14 D15 D16 D17: library part "Diode BAT17", "Silicon RF Schottky Diode for Mixer Applications in the VHF/UHF Range"
D1 D2: library part LED0, "Typical INFRARED GaAs LED"
J1: "Low Voltage Power Supply Connector"
L1: library part "Inductor Iron", "Magnetic-Core Inductor"
LS1: "Magnetic Transducer Buzzer"
P1: "High current connector"
P2 P9: library part CH3.96_2P
P2: library part XH2.54-4P
P3 P6: library part XH2.54-2P
P3 P4 P12 P13: library part "Header 4", "Header, 4-Pin"
P4 P14 P15: library part KF3.96
P5 P11: library part XH2.54-3P
P10: library part CH3.96_3P
Q1 Q3 Q6 Q8: library part NMOS-2, "N-Channel Power MOSFET"
Q1: library part CMP-0278-00001-1, "N-channel Enhancement Mode Field-Effect Transistor; 5.8A/30V"
Q2 Q4 Q5 Q7 Q9: "NPN Bipolar Transistor"
Q2: library part PNP, "PNP Bipolar Transistor"
R1 R1 R2 R2 R3 R3 R4 R5 R5 R6 R6 R7 R7 R8 R8 R9 R9 R10 R10 R11 R11 R12 R12 R13 R13 R14 R14 R15 R15 R16 R16 R17 R17 R18 R19 R20 R21 R22 R23 R24 R25 R26 R27 R28 R29 R30 R31 R32 R33 R34 R35 R36 R37 R38 R39 R40 R41 R42 R43 R44 R45 R46 R47 R49 R50 R51 R52 R53 R54 R55 R56 R57 R58 R59 R62 R63 R64: "Resistor"
R4: library part Res1, "Resistor"
R60 R61: library part Res_Pack_4, "Res_Pack_4"
S1: "DIP Switch, 8 Position, SPST"
S1 S2: library part SW-PB, "Switch"
U1: library part MQ
U2: "Digital Adjust Res"
U3: library part CMP-0069-00116-2, "SIMPLE SWITCHER? 3A Step-Down Voltage Regulator, 5-pin TO-263"
U3 U6: library part CMP-0204-00157-1, "Low Power Consumption LDO, Output Voltage 3.3V, SOT89 Pkg"
U4: library part CMP-0237-00215-3, "ARM Cortex-M3 32-bit MCU, 64 KB Flash, 20 KB Internal RAM, 37 I/Os, 48-pin LQFP, -40 to 85 degC, Tray"
U5 U5: library part ESP-07_Wifi
U6 U9 U12: library part CMP-0055-00776-3, "Low Power Dual Operational Amplifier, 8-pin Narrow SOIC"
U7: "CO2 Detector"
U10: library part CMP-0237-00161-1, "STM32 ARM-based 32-bit MCU Performance Line with 128 kB Flash, 20 kB Internal RAM, -40 to +105°C Temperature, 64-Pin LQFP, Tray"
U11: library part CMP-0055-00768-2, "Low Power Dual Operational Amplifier, 8-pin Narrow SOIC"
U13 U14 U15 U16: library part Optoisolator1, "4-Pin Phototransistor Optocoupler"
U17: "Audio Amplifier"
Y1 Y1: "Crystal Oscillator"

## Free pads (board coordinates)
  round 78.74 hole 78.74: 0(690,-1970) 0(820,-975) 0(1770,-2210) 0(2340,-655) 0(2882,-3154) 0(3220,-110) 0(3562,-1666)
  round 196.85 hole 129.92: 0(4398.66,-3350) 0(4398.66,114.57) 0(6012.83,-3350) 0(6012.83,114.57)

## Via types
v1: diameter 16, hole 8, Top Layer to Bottom Layer, tented both sides, 170 vias
v2: diameter 15, hole 8, Top Layer to Bottom Layer, tented both sides, 76 vias
v3: diameter 30, hole 15, Top Layer to Bottom Layer, tented both sides, 17 vias
v4: diameter 36, hole 18, Top Layer to Bottom Layer, tented both sides, 10 vias
v5: diameter 60, hole 35, Top Layer to Bottom Layer, tented both sides, 7 vias
v6: diameter 40, hole 20, Top Layer to Bottom Layer, tented both sides, 6 vias
v7: diameter 19.68, hole 7.87, Top Layer to Bottom Layer, tented both sides, 6 vias
v8: diameter 50, hole 25, Top Layer to Bottom Layer, tented both sides, 5 vias
v9: diameter 70, hole 35, Top Layer to Bottom Layer, tented both sides, 3 vias
v10: diameter 24, hole 12, Top Layer to Bottom Layer, tented both sides, 1 vias

## Nets (pads, with @x,y where several pads share a name; then routed paths per layer and width w, separated by ;. In a path a pad name is that pad's centre, name@x,y a point inside that pad or via, vN(x,y) a via of type N, cw(c..) or ccw(c..) an arc to the next point about the centre after c; other vN are vias at no path point)
+3.3V: C8.1@5948.7,-3078.62 C9.1@5237.4,-1070 C10.1 C11.1 C12.1@5427.4,-2410 C13.1 C14.1 C18.2 C19.2 C27.2 C28.2 C37.1 C38.1 C43.1 C44.1 P4.1@5332.83,-2140 P12.1 R6.2@1000,-1914.57 R11.2@880,-2234.57 R12.2@4607.4,-1200 R13.1@4698.27,-3280 R15.2@2880,-2504.57 R19.2 R24.2 R25.2 R29.2 R30.2 R34.2 R35.2 R38.2 R39.2 R48.8 R57.1 R64.1 U3.3@5925.08,-2942.99 U4.4@2214.17,-200 U4.9 U4.24 U4.36 U4.48 U5.1 U5.8 U6.3@5710.08,-2944.43 U7.3@3135,-1415 U8.1 U8.14 U10.13 U10.19 U10.32 U10.48 U10.64 | length 22682.5
  Top Layer w10: v1(410,-2698) 450,-2698 v1(482,-2730) ; R11.2@880,-2234.57 890,-2224.57 v1(890,-2202) ; v1(890,-1970) 904.07,-1955.93 944.07,-1955.93 1074,-1826 1994,-1826 2003,-1835 2491,-1835 v1(2498,-1842) 2514,-1826 2729,-1826 2800,-1755 R48.8@2867.8,-1755 2985,-1755 v1(3000,-1740) ; v1(1258,-2186) 1258,-2214.57 R19.2@1266,-2222.57 ; v1(1610,-3040) 1915,-3040 1980,-2975 2337,-2975 v1(2380,-2932) v1(2380,-2868) ; v1(2465,-2290) 2675,-2290 2755,-2370 2835,-2370 2880,-2415 R15.2@2880,-2504.57 ; U8.1@2734.06,-229.69 v1(2734.06,-202) 2734.06,-181.94 2756.4,-159.6 2806.62,-159.6 2816.74,-169.72 U8.14@2816.74,-202.13 ; U10.13@2752.48,-918.58 v2(2789.5,-918.58) v1(2853.42,-918.58) ; v1(2805.43,-604.57) 2813.35,-612.48 U10.64@2822.36,-612.48 ; U10.19@2861.73,-1047.52 v1(2861.73,-997.73) ; v1(2870,-465) 2870,-458.57 R30.2@2829.43,-418 2844.76,-402.68 C14.1@3100,-402.68 3212.76,-402.68 C13.1@3250,-365.43 ; v1(3035,-1430) 3050,-1415 U7.3@3135,-1415 ; U10.32@3117.64,-1047.52 3117.64,-1069.64 v2(3130,-1082) ; U10.48@3187.52,-682.36 3187.52,-680.48 v2(3210,-658) ; v1(3250,-410) C13.1@3250,-365.43 ; v1(3338,-802) 3338,-809.18 U5.8@3386,-809.18 ; U5.1@3357.43,-258 C13.1@3250,-365.43 ; P12.1@3680,-1390 3680,-1504 v1(3682,-1506) ; v1(3682,-1626) 3691.43,-1635.43 R57.1@3810,-1635.43 ; U5.1@4572.83,-1070 4572.83,-1165.43 R12.2@4607.4,-1200 4654.4,-1247 4950.83,-1247 v1(4989.83,-1208) ; R13.1@4698.27,-3280 v1(4744.83,-3280) ; v1(5043.83,-2420) 5040.83,-2423 5040.83,-2648 5071.7,-2678.87 U4.48@5104.28,-2678.87 v1(5104.28,-2696.45) ; v1(5109.83,-1133) 5114.2,-1133 5124.02,-1123.18 U5.8@5124.02,-1070 v1(5160.84,-1070) ; v1(5138.7,-2412.13) U4.36@5154.48,-2412.13 ; v1(5210.6,-1070) C9.1@5230.16,-1070 ; v1(5311.96,-2764.56) U4.9@5311.96,-2729.06 ; v1(5397.83,-2141) 5421.83,-2165 5421.83,-2357 5445.83,-2381 ; U4.24@5421.21,-2462.33 v1(5421.21,-2449.38) 5421.21,-2405.62 5445.83,-2381 ; v1(5709.83,-2786) 5709.83,-2531 5559.83,-2381 5445.83,-2381 ; U6.3@5710.08,-2944.43 v1(5710.08,-2893.76) ; v1(5946.83,-3161) 5946.83,-3080.49 C8.1@5948.7,-3078.62
  Top Layer w20: U4.4@2214.17,-200 2256,-200 2285.43,-229.43 C10.1@2322,-229.43 2402.76,-229.43 C11.1@2482,-308.68 2544.11,-246.57 R29.2@2650,-246.57 v3(2650,-194) ; U7.3@3122,-1412 3188,-1412 3213.43,-1437.43 R25.2@3266,-1437.43 3266,-1437.53 3632.47,-1437.53 P12.1@3680,-1390 3880,-1390 v4(3915,-1355) ; U5.1@3386,-258 v3(3458,-258) ; C9.1@5230.16,-1070 5230.16,-1100.32 5277.83,-1148 5871.83,-1148 6070.33,-1346.5 6070.33,-2655.87 5925.08,-2801.13 U3.3@5925.08,-2942.99 C8.1@5925.08,-3055 ; C9.1@5237.4,-1070 5237.4,-967.76 C10.1@5294.16,-911 ; U6.3@5710.08,-2944.43 5773.65,-3008 5878.08,-3008 C8.1@5925.08,-3055 ; C8.1@5948.7,-3078.62 C8.1@5925.08,-3055
  Bottom Layer w10: v1(410,-2698) 410,-2674.57 C19.2@424.57,-2660 R35.2@424.57,-2590 R34.2@424.57,-2510 C18.2@424.57,-2430 ; v1(482,-2730) 770,-2730 890,-2610 v1(890,-2202) v1(890,-1970) ; v1(970,-1914.57) 970,-2074 1066,-2170 1242,-2170 v1(1258,-2186) ; R64.1@1565,-3049.57 1574.57,-3040 v1(1610,-3040) ; v1(2380,-2932) C28.2@2380,-2974.57 R39.2@2460,-2974.57 C27.2@2540,-2974.57 R38.2@2620,-2974.57 ; v1(2380,-2868) 2380,-2290 ; v1(2465,-2290) 2380,-2290 ; v1(2498,-1842) 2498,-2067.46 2380,-2185.46 2380,-2290 ; C37.1@2730,-1064.57 2730,-1030 2790.58,-969.42 2790.58,-918.58 v2(2789.5,-918.58) ; v1(2734.06,-202) 2734.06,-174.06 ; v1(2861.73,-997.73) 2866,-993.46 2866,-931.17 v1(2853.42,-918.58) 2856,-916 2856,-781 2805.43,-730.43 v1(2805.43,-604.57) C43.1@2805.43,-530 2870,-465.43 v1(2870,-465) ; v1(3000,-1740) 3030.5,-1709.5 3030.5,-1569.01 3030,-1568.51 3030,-1435 v1(3035,-1430) ; v2(3130,-1082) 3134.57,-1086.57 C38.1@3134.57,-1130 3134.57,-1209.57 3195,-1270 3195,-1390 3170,-1415 U7.3@3135,-1415 ; v1(3250,-410) 3250,-494.44 3250.56,-495 3250.56,-553.57 3210,-594.13 C44.1@3210,-595.43 v2(3210,-658) 3298,-658 3338,-698 v1(3338,-802) ; v1(3682,-1626) v1(3682,-1506) ; v1(4744.83,-3280) 5237.84,-3280 5308.34,-3350.5 5308.34,-3378.43 5334.4,-3404.5 5703.34,-3404.5 v1(5946.83,-3161) ; v1(4989.83,-1208) 5064.83,-1133 v1(5109.83,-1133) ; v1(5043.83,-2420) 5058.4,-2405.43 C14.1@5102.84,-2405.43 5109.54,-2412.13 v1(5138.7,-2412.13) ; v1(5104.28,-2696.45) 5172.39,-2764.56 v1(5311.96,-2764.56) ; v1(5160.84,-1070) v1(5210.6,-1070) ; C13.1@5292.83,-2794.57 5292.83,-2783.68 v1(5311.96,-2764.56) ; P4.1@5332.83,-2140 5396.83,-2140 v1(5397.83,-2141) ; v1(5421.21,-2449.38) 5421.21,-2416.19 C12.1@5427.4,-2410 ; v1(5710.08,-2893.76) 5710.08,-2786.24 v1(5709.83,-2786) 5681.31,-2757.47 5455.22,-2757.47 5448.14,-2764.56 v1(5311.96,-2764.56)
  Bottom Layer w20: v3(2650,-194) 2674,-170 3435,-170 3490,-225 3490,-258 ; v3(3458,-258) 3490,-258 ; v4(3915,-1355) 3845,-1285 3845,-395 3784.57,-334.57 R24.2@3490,-334.57 3490,-258
+5V: C3.2@3160,-2234.57 C5.1@4587.4,-1640 C6.1 C45.1 C46.1 C47.1 C49.1 C50.1 D2.2@4552.83,-1791.5 D6.2 D8.2 D9.2 D12.2 D14.2 D16.2 L2.2 L3.2 LS1.1 P2.1@5352.83,-3360 P3.1@5472.83,-3100 P7.1 P8.10 P13.1 R1.1@1184.57,-2070 R7.1@4627.4,-1790 R10.1@580,-2234.57 R13.1@2700,-2575.43 R17.1@960,-2234.57 U1.1@3210.55,-2820.55 U1.2@3156.93,-2950 U4.3@1985.83,-290.55 U6.8 U7.1@5582.43,-1374.51 U9.8 U11.8 U12.8 U16.1 U17.5 | length 19984.8
  Top Layer w10: R10.1@580,-2234.57 580,-2168 618,-2130 v1(778,-2130) ; U11.8@745,-1456.46 745,-1465 v1(786,-1506) ; C50.1@862.27,-1870 C49.1@745.43,-1870 745.43,-2097.43 v1(778,-2130) ; v1(970,-2194) 960,-2204 R17.1@960,-2234.57 1124.57,-2070 R1.1@1184.57,-2070 v1(1184.57,-2027.43) ; v1(970,-2144) 956,-2130 v1(778,-2130) ; U9.8@1325,-1481.22 v1(1345.22,-1481.22) 1345.22,-1480.96 1473.74,-1352.44 v1(1474,-1352.44) ; v1(1474,-1602) 1493.5,-1602 D12.2@1520,-1628.5 1589.5,-1698 1678,-1698 1740,-1760 C46.1@1752.68,-1760 C45.1@1854.57,-1760 1916.57,-1698 2050.5,-1698 D9.2@2120,-1628.5 ; v1(1474,-1162) 1474,-1157.5 D8.2@1520,-1111.5 1531.5,-1100 1624,-1100 1666,-1058 2066.5,-1058 D6.2@2120,-1111.5 v1(2120,-1070) ; U6.8@1925,-1481.22 v1(1954,-1510.22) ; v1(2074,-1618) 2109.5,-1618 D9.2@2120,-1628.5 ; v1(2120,-870) 2200,-790 C47.1@2207.6,-790 ; v1(2295,-2710) 2295,-2675 U16.1@2300,-2670 ; v1(2529.78,-1666) U12.8@2495,-1631.22 2495,-1559 2473.94,-1537.94 2227.06,-1537.94 2227,-1538 2186,-1538 2120,-1604 D9.2@2120,-1628.5 ; v1(2626,-1722) 2633.5,-1722 D16.2@2690,-1778.5 ; v1(2642,-1282) 2662.5,-1261.5 D14.2@2690,-1261.5 ; R13.1@2700,-2575.43 2700,-2580 2750,-2630 3020,-2630 U1.1@3210.55,-2820.55
  Top Layer w20: U17.5@2887.48,-2135 2995,-2135 3040,-2090 3218.5,-2090 L2.2@3220,-2091.5
  Top Layer w25: v8(4550.16,-1548.68) C6.1@4550.16,-1640 4652.1,-1741.94 4730.38,-1741.94 4968.83,-1980.39 4968.83,-3032 v8(5016.83,-3080) ; D2.2@4552.83,-1791.5 4552.83,-1700 4583.97,-1700 v6(4587.4,-1703.43) ; D2.2@4554.33,-1790 R7.1@4627.4,-1790
  Top Layer w40: P7.1@1650,-2870 1758,-2978 v5(1794,-2978) ; U4.3@1985.83,-290.55 2009.65,-290.55 L3.2@2229.09,-510 ; C47.1@2207.6,-790 2229.09,-768.5 L3.2@2229.09,-510 ; v5(2360,-379.09) L3.2@2229.09,-510 ; U1.2@3156.93,-2950 3156.93,-2874.17 U1.1@3210.55,-2820.55 3215.45,-2820.55 3338,-2698 v5(3682,-2698) ; C3.2@3160,-2234.57 3162.76,-2237.32 3210,-2237.32 ; L2.2@3220,-2091.5 3220,-2227.32 3210,-2237.32 ; LS1.1@3699.61,-1980 3699.61,-2120.39 3645.5,-2174.5 3438.5,-2174.5 3375.68,-2237.32 C6.1@3310,-2237.32 3210,-2237.32
  Bottom Layer w10: v1(778,-2130) 786,-2122 v1(786,-1506) ; v1(970,-2194) v1(970,-2144) ; v1(1184.57,-2027.43) 1184.57,-1891.43 v1(1474,-1602) 1466,-1602 v1(1345.22,-1481.22) ; v1(1474,-1352.44) v1(1474,-1162) ; v1(1954,-1510.22) 2061.78,-1618 v1(2074,-1618) ; v1(2120,-1070) v1(2120,-870) ; v1(2295,-2710) 2296,-2711 2296,-3192 2306,-3202 ; v1(2529.78,-1666) 2585.78,-1722 v1(2626,-1722) 2626,-1298 v1(2642,-1282) ; P13.1@3560,-1390 3628,-1458 3762,-1458
  Bottom Layer w25: v8(4550.16,-1548.68) 4626.83,-1472 5484.94,-1472 U7.1@5582.43,-1374.51 ; v6(4587.4,-1703.43) C5.1@4587.4,-1640 ; v8(5016.83,-3080) 5036.83,-3100 P3.1@5472.83,-3100 5472.83,-3240 P2.1@5352.83,-3360
  Bottom Layer w40: v5(1794,-2978) 2018,-3202 2306,-3202 2723,-3202 2975,-2950 U1.2@3156.93,-2950 ; v5(2360,-379.09) 2425.09,-314 3269,-314 3762,-807 3762,-1458 3762,-1980 ; v5(3682,-2698) 3762,-2618 3762,-1980 ; LS1.1@3699.61,-1980 3762,-1980 ; P8.10@3890,-1990 3830,-1990 3820,-1980 3762,-1980
+5V_IN: C1.1@5628.43,-1614 J1.1 U1.4@5600.31,-1852.2 U1.8 | length 776
  Top Layer w10: U1.8@5385.74,-2002.2 5390.87,-2007.32 5551.44,-2007.32 5558.76,-2000 5558.76,-1891.92 5598.49,-1852.2 U1.4@5600.31,-1852.2 ; 5660.24,-1852.2 5669.51,-1861.47
  Top Layer w25: C1.1@5628.43,-1614 5600.31,-1642.13 U1.4@5600.31,-1852.2 5660.24,-1852.2 J1.1@5737.24,-1775.2
+12V: C4.1@1737.48,-2540 C5.1@1180,-2624.57 C7.1@972.4,-870 C9.1@2810,-2765.43 C12.1@1270,-2495.43 CB1.2 D1.2@1270,-2611.5 D3.2 D5.2 P2.1@1410,-3050 P4.1@220,-2880 P6.1 P9.1 R4.2@800,-435.43 U3.1@966.14,-634.25 | length 8497.9
  Top Layer w40: P4.1@220,-2880 486,-3146 894,-3146 P9.1@990,-3050 ; R4.2@800,-435.43 966.14,-601.57 U3.1@966.14,-634.25 C7.1@966.14,-870 ; D1.2@1270,-2611.5 1256.93,-2624.57 C5.1@1180,-2624.57 ; C12.1@1270,-2495.43 1246.93,-2518.5 D5.2@1180,-2518.5 C5.1@1180,-2624.57 ; C4.1@1737.48,-2540 1410,-2867.48 P2.1@1410,-3050 ; P6.1@2460,-2870 2460,-2908 2514,-2962 2596.5,-2962 D3.2@2720,-2838.5 ; C9.1@2810,-2765.43 2736.93,-2838.5 D3.2@2720,-2838.5 ; P9.1@990,-3050 1094,-3154 1306,-3154 P2.1@1410,-3050 ; P9.1@990,-3050 1122,-2918 1122,-2644.27 1141.7,-2624.57 C5.1@1180,-2624.57 ; P2.1@1410,-3050 1618,-3258 2672,-3258 2780,-3150 2780,-3000 2720,-2940 D3.2@2720,-2838.5
  Top Layer w50: CB1.2@800,-830 840,-870 C7.1@966.14,-870
  Top Layer w100: P4.1@220,-2880 162,-2822 162,-1122 484,-800 CB1.2@800,-800 CB1.2@800,-830
AD_IN: C17.2@1930,-1175.43 D6.1 D7.2 R26.1 U10.17 | length 1280.8
  Top Layer w10: R26.1@1850,-1104.57 1920.87,-1175.43 C17.2@1930,-1175.43 1946.93,-1175.43 D7.2@2020,-1248.5 ; v2(2178,-1202) 2131.5,-1248.5 D6.1@2120,-1248.5 ; v2(2194,-1074) 2200,-1068 2680,-1068 2700.48,-1047.52 U10.17@2822.36,-1047.52 ; D7.2@2020,-1248.5 D6.1@2120,-1248.5 ; D7.2@2020,-1248.5 D6.1@2120,-1248.5
  Bottom Layer w10: v2(2178,-1202) 2178,-1090 v2(2194,-1074)
AD_OUT: C15.2@1690,-1175.43 P5.2 R27.2 | length 2077.7
  Top Layer w10: v1(1645,-1270) 1660.43,-1254.57 R27.2@1690,-1254.57
  Top Layer w20: R27.2@1690,-1254.57 C15.2@1690,-1175.43
  Bottom Layer w10: v1(1645,-1270) 1630,-1285 1630,-1839.53 1644,-1853.53 1644,-2813.07 1605.5,-2851.57 1605.5,-2888.43 1748.43,-3031.35 P5.2@1748.43,-3130
ADS_IN: C26.2 D9.1 D11.2 R32.1 U10.50 | length 2046.3
  Top Layer w10: R32.1@1850,-1635.43 1920.87,-1564.57 C26.2@1930,-1564.57 1946.93,-1564.57 D11.2@2020,-1491.5 D9.1@2120,-1491.5 2216.5,-1491.5 2227.06,-1502.06 2502.35,-1502.06 2534.4,-1470 2815,-1470 v1(2840,-1445) ; v1(2840,-980) 2855,-965 2905,-965 3097.95,-772.05 U10.50@3097.95,-612.48
  Bottom Layer w10: v1(2840,-1445) v1(2840,-980)
ADS_OUT: C24.2 P5.1 R36.2 R64.2 | length 1923
  Top Layer w10: v1(1540,-1575) 1550.43,-1564.57 C24.2@1690,-1564.57
  Top Layer w20: C24.2@1690,-1564.57 R36.2@1690,-1485.43
  Bottom Layer w10: v1(1540,-1575) 1541.5,-1576.5 1541.5,-1869.5 1585,-1913 1585,-2915 1650,-2980 P5.1@1650,-3130 1574.57,-3130 R64.2@1565,-3120.43
ALCOHOL_C: R5.1@3346,-2902.57 U1.6@3469.45,-2820.55 U10.24 | length 2143.3
  Top Layer w10: v1(2958.84,-1150.39) 2960.16,-1149.08 U10.24@2960.16,-1047.52
  Bottom Layer w10: v1(2958.84,-1150.39) 2959.23,-1150 2959.23,-1964.23 3075,-2080 3075,-2426.1 U1.6@3469.45,-2820.55 3428.02,-2820.55 R5.1@3346,-2902.57
AUDIO: C1.1@2820,-1844.57 U10.20 | length 858.8
  Top Layer w10: C1.1@2820,-1844.57 2865.43,-1844.57 v1(2880,-1830) ; v1(2870,-1105) 2870,-1100.13 2881.42,-1088.71 U10.20@2881.42,-1047.52
  Bottom Layer w10: v1(2870,-1105) 2870,-1821.41 2879.3,-1830.7 v1(2880,-1830)
BEE: R14.2@3214.57,-1680 U10.38 | length 905.2
  Top Layer w10: U10.38@3187.52,-879.21 3235.94,-879.21 v1(3237.26,-877.9) ; v2(3194,-1618) 3194,-1659.43 R14.2@3214.57,-1680
  Bottom Layer w10: v2(3194,-1618) 3242.06,-1569.94 3242.06,-1011.06 3229.5,-998.5 3229.5,-969.51 3255,-944.01 3255,-895 3237.26,-877.26 v1(3237.26,-877.9)
C\H\R\G\: R3.2@5271.1,-2312.32 U4.28 | length 116.7
  Top Layer w10: R3.2@5271.1,-2312.32 5271.1,-2332.27 5311.96,-2373.13 U4.28@5311.96,-2412.13
CO2PWM: U4.10 U7.6 | length 1617.1
  Top Layer w10: v1(5160.83,-2363) 5160.83,-2201 5181.83,-2180 5181.83,-1565 5331.83,-1415 5331.83,-1325.1 U7.6@5382.43,-1274.51 ; v1(5202.83,-2492) 5331.65,-2620.81 U4.10@5331.65,-2729.06
  Bottom Layer w10: v1(5160.83,-2363) 5160.83,-2399 5202.83,-2441 v1(5202.83,-2492)
CS_SD: R2.1@2934.57,-2400 U10.55 | length 1994.7
  Top Layer w10: v1(2785,-1020) 2790,-1015 2790,-995 2840,-945 2899.54,-945 2999.53,-845.02 U10.55@2999.53,-612.48 ; v1(2810.92,-2161) v1(2810.92,-2105.97)
  Bottom Layer w10: v1(2785,-1020) 2785,-2074.54 2810.92,-2100.46 v1(2810.92,-2105.97) ; v1(2810.92,-2161) 2812.92,-2159 2842.84,-2159 2865,-2181.16 2865,-2330.43 R2.1@2934.57,-2400
DEBUG_RX: P3.3 R63.2 U4.22 U10.43 | length 1170.6
  Top Layer w10: U10.43@3187.52,-780.79 3187.87,-780.43 3430.75,-780.43 3431.11,-780.79 3440.79,-780.79 3472.5,-812.5 3472.5,-1002.96 3395.46,-1080 R63.2@3394.57,-1080 ; v1(5342.83,-2585) 5342.83,-2534.69 5375.82,-2501.7 U4.22@5421.21,-2501.7 ; P3.3@5472.83,-2900 5517.83,-2855 5517.83,-2735 v1(5472.83,-2690)
  Bottom Layer w10: v1(5342.83,-2585) 5356.83,-2599 5396.83,-2599 5472.83,-2675 v1(5472.83,-2690)
DEBUG_TX: P3.2@5472.83,-3000 R56.2 U4.21 U10.42 | length 1240.5
  Top Layer w10: U10.42@3187.52,-800.47 3293.46,-800.47 3454.5,-961.51 3454.5,-995.5 3440,-1010 3360,-1010 3330,-1040 3330,-1095.43 R56.2@3394.57,-1160 ; v1(5367.83,-2620) 5367.83,-2535.14 5381.59,-2521.39 U4.21@5421.21,-2521.39 ; v1(5442.83,-2700) 5442.83,-2761 5423.83,-2780 5423.83,-2951 P3.2@5472.83,-3000
  Bottom Layer w10: v1(5367.83,-2620) 5442.83,-2695 v1(5442.83,-2700)
E2_SCL: R48.6 U10.25 | length 725.5
  Top Layer w10: R48.6@2867.8,-1655 2980.84,-1655 v2(2985.84,-1650) ; U10.25@2979.84,-1047.52 2979.84,-1163.84 v2(2986,-1170)
  Bottom Layer w10: v2(2985.84,-1650) 2986,-1650.16 v2(2986,-1170)
E2_SDA: R48.5 U10.26 | length 688.2
  Top Layer w10: R48.5@2867.8,-1605 2983,-1605 v2(3010,-1578) ; U10.26@2999.53,-1047.52 2999.53,-1143.53 v2(3002,-1146)
  Bottom Layer w10: v2(3002,-1146) 3010,-1154 v2(3010,-1578)
FAN: R15.1@2880,-2575.43 R16.1@2790,-2575.43 R43.2 U10.28 | length 2011.5
  Top Layer w10: v1(2745,-2530) 2790,-2575 R16.1@2790,-2575.43 R15.1@2880,-2575.43 ; v1(2745,-1850) 2795,-1800 v1(3045,-1800) ; U10.28@3038.9,-1047.52 3038.9,-1121.91 3046.99,-1130 v1(3050,-1130) R43.2@3134.57,-1130
  Bottom Layer w10: v1(2745,-2530) v1(2745,-1850) ; v1(3045,-1800) 3050,-1800 3060,-1790 3060,-1140 v1(3050,-1130)
FHD_IN: C31.2 D12.1 D13.2 R40.1 U10.14 | length 2030.3
  Top Layer w10: R40.1@1250,-1635.43 1320.87,-1564.57 C31.2@1330,-1564.57 1346.93,-1564.57 D13.2@1420,-1491.5 D12.1@1520,-1491.5 1520.5,-1491.5 v2(1562,-1450) ; v2(1594,-1010) 1600,-1004 2647.13,-1004 2712.86,-938.27 U10.14@2752.48,-938.27
  Bottom Layer w10: v2(1562,-1450) 1562,-1042 v2(1594,-1010)
FHD_OUT: C19.1 C29.2 P10.1 R35.1 R41.2 | length 1954.2
  Top Layer w10: v1(618,-2178) 637,-2159 909,-2159 v1(914,-2154) ; v1(914,-1578) 927.43,-1564.57 C29.2@1090,-1564.57 R41.2@1090,-1495.43
  Bottom Layer w10: P10.1@290,-2660 352,-2722 433.43,-2722 C19.1@495.43,-2660 R35.1@495.43,-2590 550,-2590 594,-2546 594,-2202 v1(618,-2178) ; v1(914,-2154) v1(914,-1578)
FIRE_TEM_D: R42.2 U10.8 U11.1 | length 2368.7
  Top Layer w10: U11.1@745,-1263.54 750,-1258.54 R42.2@750,-1155.43 856.57,-1155.43 v1(890,-1122) ; v2(922,-930) 2618,-930 2650,-898 2650,-858 2687.84,-820.16 U10.8@2752.48,-820.16
  Bottom Layer w10: v1(890,-1122) 898,-1114 898,-954 v2(922,-930)